# EAGLE board main (EAGLE 6.6.0)
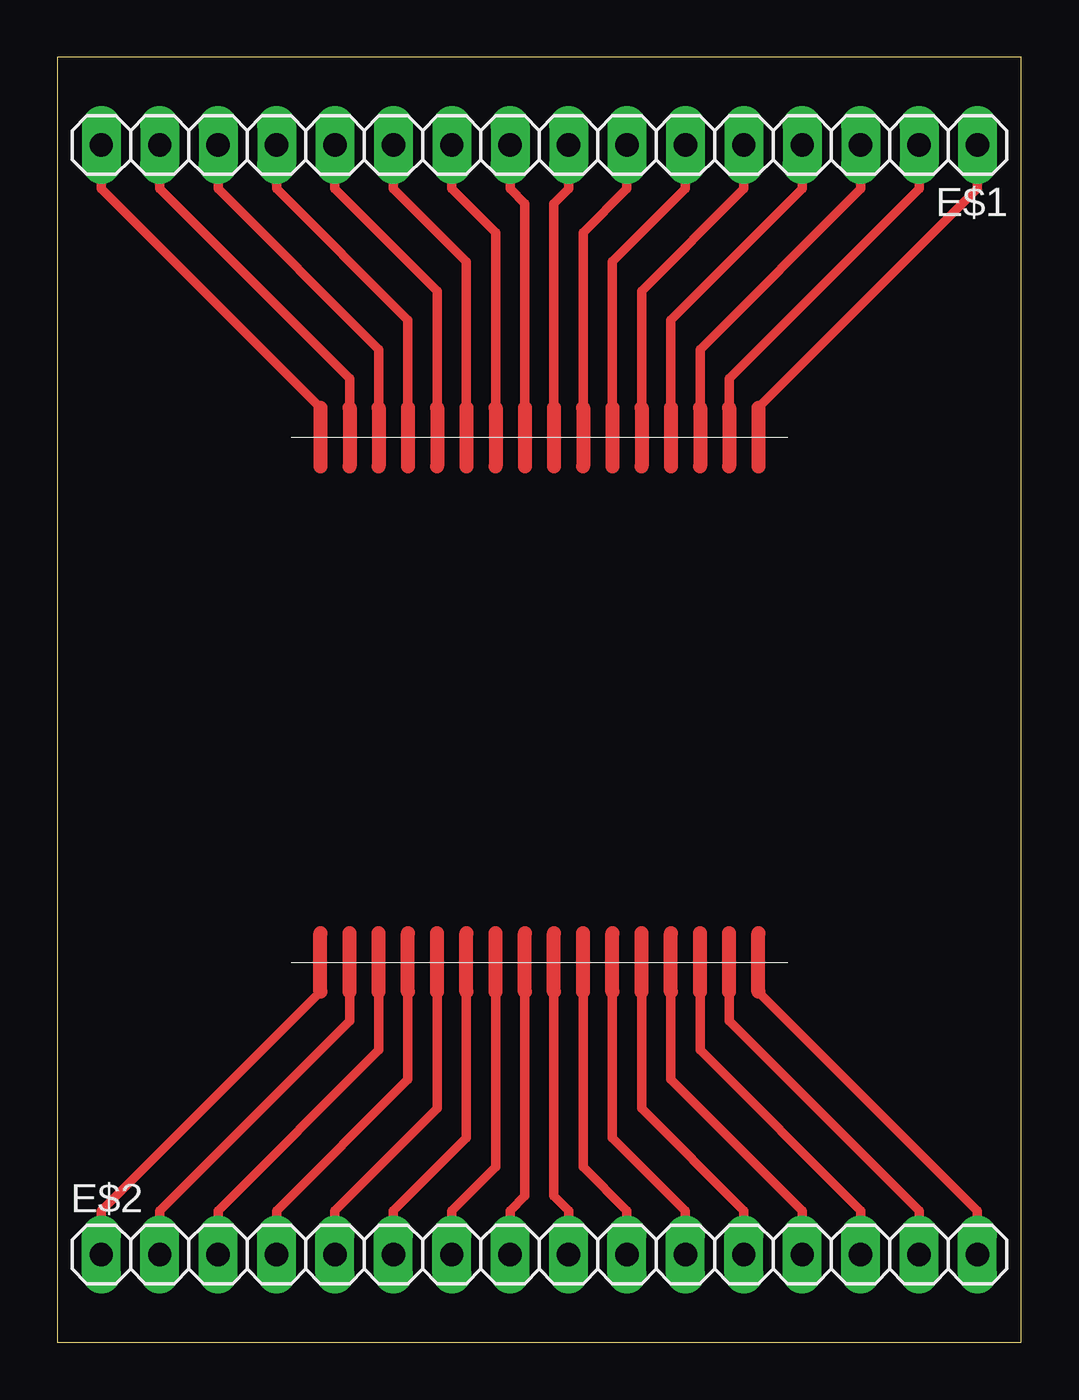
[diagram p0: board, top side]

Size 41.91 x 55.88 mm. Coordinates in mm from the lower left corner, seen from the top.
Outline: 0,0 41.91,0 41.91,55.88 0,55.88 0,0
Copper layers (1*16): Top 0.035mm / dielectric 1.5mm / Bottom 0.035mm
Design rules "default *": minimum track width 10mil, minimum drill 24mil, track to track 8mil, track to pad 8mil, pad to pad 8mil, via to via 8mil, smd to smd 8mil, copper to edge 40mil, drill to drill 8mil, minimum pad ring 10mil, minimum via ring 8mil, stop-mask expansion 4mil, vias tented up to drill 0mil, thermal gap 10mil

## Footprints (pad centres in the part's own frame; a part is rotated, then mirrored left to right if it is on the bottom)
1X16 = drill 1.016 long: 1 -19.05,0; 2 -16.51,0; 3 -13.97,0; 4 -11.43,0; 5 -8.89,0; 6 -6.35,0; 7 -3.81,0; 8 -1.27,0; 9 1.27,0; 10 3.81,0; 11 6.35,0; 12 8.89,0; 13 11.43,0; 14 13.97,0; 15 16.51,0; 16 19.05,0

## Placement (x,y rotation side)
E$1  [1X16]  20.95,52.07 180 top
E$2  [1X16]  20.95,3.81 0 top

## Library data of the parts
E$1 E$2 = pinhead

## Nets
S$1: E$2.1
S$2: E$2.2
S$3: E$2.3
S$4: E$2.4
S$5: E$2.5
S$6: E$2.6
S$7: E$2.7
S$8: E$2.8
S$9: E$2.10
S$10: E$2.11
S$11: E$2.12
S$12: E$2.13
S$13: E$2.14
S$14: E$2.15
S$15: E$2.16
S$16: E$2.9
S$17: E$1.1
S$18: E$1.9
S$19: E$1.3
S$20: E$1.4
S$21: E$1.5
S$22: E$1.6
S$23: E$1.7
S$25: E$1.8
S$26: E$1.10
S$27: E$1.11
S$28: E$1.12
S$29: E$1.13
S$30: E$1.14
S$33: E$1.2
S$34: E$1.15
S$35: E$1.16

## Tracks (layer width: path | path; a pad name or v marks a point on that pad's centre or on a via)
S$1
  Top 0.406: 11.43,15.24 1.91,5.71 E$2.1
  Top 0.61: 11.43,15.24 11.43,17.78
S$2
  Top 0.406: 12.7,15.24 12.7,13.97 4.45,5.71 E$2.2
  Top 0.61: 12.7,15.24 12.7,17.78
S$3
  Top 0.406: 13.97,15.24 13.97,12.7 6.99,5.71 E$2.3
  Top 0.61: 13.97,15.24 13.97,17.78
S$4
  Top 0.406: 15.24,15.24 15.24,11.43 9.53,5.71 E$2.4
  Top 0.61: 15.24,15.24 15.24,17.78
S$5
  Top 0.406: 16.51,15.24 16.51,10.16 12.06,5.71 E$2.5
  Top 0.61: 16.51,15.24 16.51,17.78
S$6
  Top 0.406: 17.78,15.24 17.78,8.89 14.61,5.71 E$2.6
  Top 0.61: 17.78,15.24 17.78,17.78
S$7
  Top 0.406: 19.05,15.24 19.05,7.62 17.14,5.71 E$2.7
  Top 0.61: 19.05,15.24 19.05,17.78
S$8
  Top 0.406: 20.32,15.24 20.32,6.35 19.68,5.71 E$2.8
  Top 0.61: 20.32,15.24 20.32,17.78
S$9
  Top 0.406: 22.86,15.24 22.86,7.62 24.77,5.71 E$2.10
  Top 0.61: 22.86,15.24 22.86,17.78
S$10
  Top 0.406: 24.13,15.24 24.13,8.89 27.3,5.71 E$2.11
  Top 0.61: 24.13,15.24 24.13,17.78
S$11
  Top 0.406: 25.4,15.24 25.4,10.16 29.84,5.71 E$2.12
  Top 0.61: 25.4,15.24 25.4,17.78
S$12
  Top 0.406: 26.67,15.24 26.67,11.43 32.38,5.71 E$2.13
  Top 0.61: 26.67,15.24 26.67,17.78
S$13
  Top 0.406: 27.94,15.24 27.94,12.7 34.92,5.71 E$2.14
  Top 0.61: 27.94,15.24 27.94,17.78
S$14
  Top 0.406: 29.21,15.24 29.21,13.97 37.47,5.71 E$2.15
  Top 0.61: 29.21,15.24 29.21,17.78
S$15
  Top 0.406: 30.48,15.24 40.01,5.71 E$2.16
  Top 0.61: 30.48,15.24 30.48,17.78
S$16
  Top 0.406: 21.59,15.24 21.59,6.35 22.23,5.71 E$2.9
  Top 0.61: 21.59,15.24 21.59,17.78
S$17
  Top 0.406: 30.48,40.64 40.01,50.16 E$1.1
  Top 0.61: 30.48,40.64 30.48,38.1
S$18
  Top 0.406: 20.32,40.64 20.32,49.53 19.68,50.16 E$1.9
  Top 0.61: 20.32,40.64 20.32,38.1
S$19
  Top 0.406: 27.94,40.64 27.94,43.18 34.92,50.16 E$1.3
  Top 0.61: 27.94,40.64 27.94,38.1
S$20
  Top 0.406: 26.67,40.64 26.67,44.45 32.38,50.16 E$1.4
  Top 0.61: 26.67,40.64 26.67,38.1
S$21
  Top 0.406: 25.4,40.64 25.4,45.72 29.84,50.16 E$1.5
  Top 0.61: 25.4,40.64 25.4,38.1
S$22
  Top 0.406: 24.13,40.64 24.13,46.99 27.3,50.16 E$1.6
  Top 0.61: 24.13,40.64 24.13,38.1
S$23
  Top 0.406: 22.86,40.64 22.86,48.26 24.77,50.16 E$1.7
  Top 0.61: 22.86,40.64 22.86,38.1
S$25
  Top 0.406: 21.59,40.64 21.59,49.53 22.23,50.16 E$1.8
  Top 0.61: 21.59,40.64 21.59,38.1
S$26
  Top 0.406: 19.05,40.64 19.05,48.26 17.14,50.16 E$1.10
  Top 0.61: 19.05,40.64 19.05,38.1
S$27
  Top 0.406: 17.78,40.64 17.78,46.99 14.61,50.16 E$1.11
  Top 0.61: 17.78,40.64 17.78,38.1
S$28
  Top 0.406: 16.51,40.64 16.51,45.72 12.06,50.16 E$1.12
  Top 0.61: 16.51,40.64 16.51,38.1
S$29
  Top 0.406: 15.24,40.64 15.24,44.45 9.53,50.16 E$1.13
  Top 0.61: 15.24,40.64 15.24,38.1
S$30
  Top 0.406: 13.97,40.64 13.97,43.18 6.99,50.16 E$1.14
  Top 0.61: 13.97,40.64 13.97,38.1
S$33
  Top 0.406: 29.21,40.64 29.21,41.91 37.47,50.16 E$1.2
  Top 0.61: 29.21,40.64 29.21,38.1
S$34
  Top 0.406: 12.7,40.64 12.7,41.91 4.45,50.16 E$1.15
  Top 0.61: 12.7,40.64 12.7,38.1
S$35
  Top 0.406: 11.43,40.64 1.91,50.16 E$1.16
  Top 0.61: 11.43,40.64 11.43,38.1